# EAGLE board CT_schematic (EAGLE 7.6.0)

Size 100 x 80 mm. Coordinates in mm from the lower left corner, seen from the top.
Outline: 0,0 100,0 100,80 0,80 0,0
Copper layers (1*16): Top 0.035mm / dielectric 1.5mm / Bottom 0.035mm
Design rules "default": minimum track width 10mil, minimum drill 24mil, track to track 8mil, track to pad 8mil, pad to pad 8mil, via to via 8mil, smd to smd 8mil, copper to edge 40mil, drill to drill 8mil, minimum pad ring 10mil, minimum via ring 8mil, stop-mask expansion 4mil, vias tented up to drill 0mil, thermal gap 10mil

## Footprints (pad centres in the part's own frame; a part is rotated, then mirrored left to right if it is on the bottom)
C0603 = smd 0.8 x 0.8: 1 -0.762,0; 2 0.762,0
C0402 = smd 0.5 x 0.5: 1 -0.508,0; 2 0.508,0
R0603 = smd 0.8 x 0.8: 1 -0.762,0; 2 0.762,0
C1210 = smd 1.2 x 2.5: 1 -1.524,0; 2 1.524,0
EXV-9H = smd 3.505 x 1.676: 1 -2.857,0; 2 2.857,0
L0603 = smd 0.8 x 0.8: 1 -0.762,0; 2 0.762,0
PJ-037B_PACKAGE = drill 3.7 square: 1 12,0 | drill 3.2 square: 2 6,0
WLCSP25 = smd 0.32 x 0.32: A1 -0.8,0.8; A2 -0.4,0.8; A3 0,0.8; A4 0.4,0.8; A5 0.8,0.8; B1 -0.8,0.4; B2 -0.4,0.4; B3 0,0.4; B4 0.4,0.4; B5 0.8,0.4; C1 -0.8,0; C2 -0.4,0; C3 0,0; C4 0.4,0; C5 0.8,0; D1 -0.8,-0.4; D2 -0.4,-0.4; D3 0,-0.4; D4 0.4,-0.4; D5 0.8,-0.4; E1 -0.8,-0.8; E2 -0.4,-0.8; E3 0,-0.8; E4 0.4,-0.8; E5 0.8,-0.8
TST-110-05-T-D-RA = drill 1 pad 1.7 square: 1 0,0 | drill 1 pad 1.7: 2 0,2.54; 3 2.54,0; 4 2.54,2.54; 5 5.08,0; 6 5.08,2.54; 7 7.62,0; 8 7.62,2.54; 9 10.16,0; 10 10.16,2.54; 11 12.7,0; 12 12.7,2.54; 13 15.24,0; 14 15.24,2.54; 15 17.78,0; 16 17.78,2.54; 17 20.32,0; 18 20.32,2.54; 19 22.86,0; 20 22.86,2.54
WNG008 = smd 0.45 x 0.55: 1 -1.27,0; 2 0,0; 3 1.27,0; 4 2.54,0; 5 2.54,7.5; 6 1.27,7.5; 7 0,7.5; 8 -1.27,7.53 | smd 4.9 x 4.75: PAD 0.635,3.75
ABS07-32.768KHZ-7-T = smd 1.1 x 2.4: 1 -2.5,0; 2 0,0
ASFL1 = smd 1.7 x 1.5: 1 -1.27,-1.1; 2 1.27,-1.1; 3 1.27,1.1; 4 -1.27,1.1
WSON-8 = smd 0.3 x 0.6: 1 -0.75,0; 2 0.05,0; 3 0.85,0; 4 1.65,0; 5 1.65,3.8; 6 0.85,3.8; 7 0.05,3.8; 8 -0.75,3.8 | smd 3 x 2.6: PAD 0.45,1.9
SON-6 = smd 0.55 x 0.3: 1 -0.355,0.5 | smd 0.52 x 0.3: 2 -0.37,0; 3 -0.37,-0.5; 4 0.37,-0.5; 5 0.37,0; 6 0.37,0.5
SW_4-1437565-2 = smd 1.4 x 2.1: 1 -2.23,4.55; 2 -2.23,-4.55; 3 2.23,4.55; 4 2.23,-4.55
LGM67K-G1J2-24-Z = smd 0.8 x 1.4: A -2,0; C 0,0
NC7SZ125M5X = smd 1.3 x 0.7: 1 -1.3,0.95; 2 -1.3,0; 3 -1.3,-0.95; 4 1.3,-0.95; 5 1.3,0.95

## Placement (x,y rotation side)
C1  1e-07  [C0603]  -48.26,59.69 0 top  (outside the outline)
C2  1e-07  [C0603]  -52.07,59.69 0 top  (outside the outline)
C3  1e-07  [C0603]  -55.88,59.69 0 top  (outside the outline)
C4  1e-07  [C0603]  -59.69,59.69 0 top  (outside the outline)
C5  4.7e-06  [C0603]  -44.45,59.69 0 top  (outside the outline)
C6  1e-08  [C0603]  -15.24,64.77 0 top  (outside the outline)
C7  1e-06  [C0603]  -19.05,64.77 0 top  (outside the outline)
C8  1e-11  [C0402]  -45.72,64.77 0 top  (outside the outline)
C9  1e-11  [C0402]  -49.53,64.77 0 top  (outside the outline)
C10  1e-07  [C0402]  -53.34,64.77 0 top  (outside the outline)
C11  1e-08  [C0402]  -57.15,64.77 0 top  (outside the outline)
C12  1e-08  [C0402]  -60.96,64.77 0 top  (outside the outline)
C13  8e-07  [R0603]  -22.86,64.77 0 top  (outside the outline)
C14  1e-05  [C1210]  -59.69,46.99 0 top  (outside the outline)
C15  1e-07  [C0402]  -15.24,69.85 0 top  (outside the outline)
C16  0.0001  [EXV-9H]  -54.61,39.37 0 top  (outside the outline)
C17  0.0001  [EXV-9H]  -17.78,46.99 0 top  (outside the outline)
C18  1e-08  [C0402]  -19.05,69.85 0 top  (outside the outline)
C19  1e-08  [C0402]  -22.86,69.85 0 top  (outside the outline)
F1  240.0  [L0603]  -26.67,64.77 0 top  (outside the outline)
J1  PJ-037B  [PJ-037B_PACKAGE]  -27.94,7.62 0 top  (outside the outline)
R1  10000.0  [R0603]  -54.61,53.34 0 top  (outside the outline)
R2  1000.0  [R0603]  -30.48,64.77 0 top  (outside the outline)
R3  1600.5  [R0603]  -34.29,64.77 0 top  (outside the outline)
R4  4700.0  [R0603]  -38.1,64.77 0 top  (outside the outline)
R5  10000.0  [R0603]  -59.69,53.34 0 top  (outside the outline)
R6  10000.0  [R0603]  -15.24,59.69 0 top  (outside the outline)
R7  10000.0  [R0603]  -20.32,59.69 0 top  (outside the outline)
R8  10000.0  [R0603]  -25.4,59.69 0 top  (outside the outline)
R9  10000.0  [R0603]  -30.48,59.69 0 top  (outside the outline)
R10  100000.0  [R0603]  -34.29,53.34 0 top  (outside the outline)
R11  153694.38  [R0603]  -29.21,53.34 0 top  (outside the outline)
R12  100000.0  [R0603]  -39.37,53.34 0 top  (outside the outline)
R13  10000.0  [R0603]  -35.56,59.69 0 top  (outside the outline)
R14  10000.0  [R0603]  -40.64,59.69 0 top  (outside the outline)
R15  9100.0  [R0603]  -41.91,64.77 0 top  (outside the outline)
R16  680000.0  [R0603]  -44.45,53.34 0 top  (outside the outline)
R17  120000.0  [R0603]  -49.53,53.34 0 top  (outside the outline)
U1  STM32L031E4Y6  [WLCSP25]  -36.83,68.58 0 top  (outside the outline)
U2  TST-110-05-T-D-RA  [TST-110-05-T-D-RA]  -46.99,36.83 0 top  (outside the outline)
U3  S25FL128SDPNFI001  [WNG008]  -29.21,17.78 0 top  (outside the outline)
U4  ABS07-32.768KHZ-7-T  [ABS07-32.768KHZ-7-T]  -39.37,46.99 0 top  (outside the outline)
U5  ASFL1-12MHZ-NCS  [ASFL1]  -26.67,30.48 0 top  (outside the outline)
U6  LP2951ACSDX/NOPB  [WSON-8]  -46.99,17.78 0 top  (outside the outline)
U7  TPS3895ADRYR  [SON-6]  -39.37,68.58 0 top  (outside the outline)
U8  4-1437565-2  [SW_4-1437565-2]  -44.45,6.35 0 top  (outside the outline)
U9  Q65110A2395  [LGM67K-G1J2-24-Z]  -48.26,46.99 0 top  (outside the outline)
U10  nc7sz125m5x  [NC7SZ125M5X]  -15.24,53.34 0 top  (outside the outline)
U11  nc7sz125m5x  [NC7SZ125M5X]  -21.59,53.34 0 top  (outside the outline)

## Library data of the parts
C1-C19 F1 J1 R1-R17 U1-U11 = circuit_tree

## Nets
CLK_CRYSTAL_U1_B5: C8.1 U1.B5 U4.1
CLK_CRYSTAL_U1_C5: C9.1 U1.C5 U4.2
GND: C1.2 C2.2 C3.2 C4.2 C5.2 C6.2 C7.2 C8.2 C9.2 C10.2 C11.2 C12.2 C13.2 C14.2 C15.2 C16.2 C17.2 C18.2 C19.2 J1.2 R2.2 R5.2 R12.2 R15.2 R17.2 U1.E1 U2.4 U2.6 U2.8 U2.10 U2.12 U2.14 U2.16 U2.18 U2.20 U3.4 U3.PAD U5.2 U6.3 U6.4 U6.PAD U7.2 U9.C U10.2 U10.3 U11.1 U11.3
NET_U1_A5: R5.1 U1.A5
NET_U1_C4: C6.1 C7.1 F1.1 U1.C4
NET_U1_D5: R4.1 U1.D5 U11.4
NET_U1_E4: R3.1 U1.E4 U9.A
NET_U1_E5: R1.1 U1.E5 U5.3 U8.3 U8.4
NET_U3_3: R7.1 U3.3
NET_U3_7: R9.1 U3.7
NET_U6_5: R10.1 U6.5
NET_U6_7: R11.2 R12.1 U6.7
NET_U7_1: R14.1 R15.1 U7.1
NET_U7_3: R16.2 R17.1 U7.3
NET_U7_4: R13.1 U7.4 U10.4 U11.2
NET_U8_1: R2.1 U8.1 U8.2
PROC_SPI1_MISO: U1.E2 U3.2
PROC_SPI1_MOSI: U1.C3 U3.5
PROC_SPI1_NSS: R8.1 U1.B3 U3.1
PROC_SPI1_SCK: U1.B2 U3.6
PROC_SYS_SWCLK: U1.A2 U2.9
PROC_SYS_SWDIO: U1.A1 U2.7
RST_OUT_U2_SRESET_B: R6.1 U2.15 U10.1
VCC_S1_12V7: C13.1 C16.1 C17.1 J1.1 U6.8
VCC_TIER1_3V3: C1.1 C2.1 C3.1 C4.1 C5.1 C10.1 C11.1 C12.1 C14.1 C15.1 C18.1 C19.1 F1.2 R1.2 R3.2 R4.2 R6.2 R7.2 R8.2 R9.2 R10.2 R11.1 R13.2 R14.2 R16.1 U1.D1 U2.1 U3.8 U5.4 U6.1 U7.6 U10.5 U11.5

## Tracks (layer width: path | path; a pad name or v marks a point on that pad's centre or on a via)
CLK_CRYSTAL_U1_B5  (2 unrouted)
CLK_CRYSTAL_U1_C5  (2 unrouted)
GND  (46 unrouted)
NET_U1_A5  (1 unrouted)
NET_U1_C4  (3 unrouted)
NET_U1_D5  (2 unrouted)
NET_U1_E4  (2 unrouted)
NET_U1_E5  (4 unrouted)
NET_U3_3  (1 unrouted)
NET_U3_7  (1 unrouted)
NET_U6_5  (1 unrouted)
NET_U6_7  (2 unrouted)
NET_U7_1  (2 unrouted)
NET_U7_3  (2 unrouted)
NET_U7_4  (3 unrouted)
NET_U8_1  (2 unrouted)
PROC_SPI1_MISO  (1 unrouted)
PROC_SPI1_MOSI  (1 unrouted)
PROC_SPI1_NSS  (2 unrouted)
PROC_SPI1_SCK  (1 unrouted)
PROC_SYS_SWCLK  (1 unrouted)
PROC_SYS_SWDIO  (1 unrouted)
RST_OUT_U2_SRESET_B  (2 unrouted)
VCC_S1_12V7  (4 unrouted)
VCC_TIER1_3V3  (32 unrouted)